# Altium PCB SW.PcbDoc (part 2 of 2)
Units mm, origin at the board's own origin, x right, y up, seen from the top; angles counter-clockwise.
Board outline 130 x 71 mm, 4 copper layers (Top Layer, Mid Layer 1, Mid Layer 2, Bottom Layer), stack 1.57 mm thick; 152 components, 276 nets, 868 pads, 520 vias.
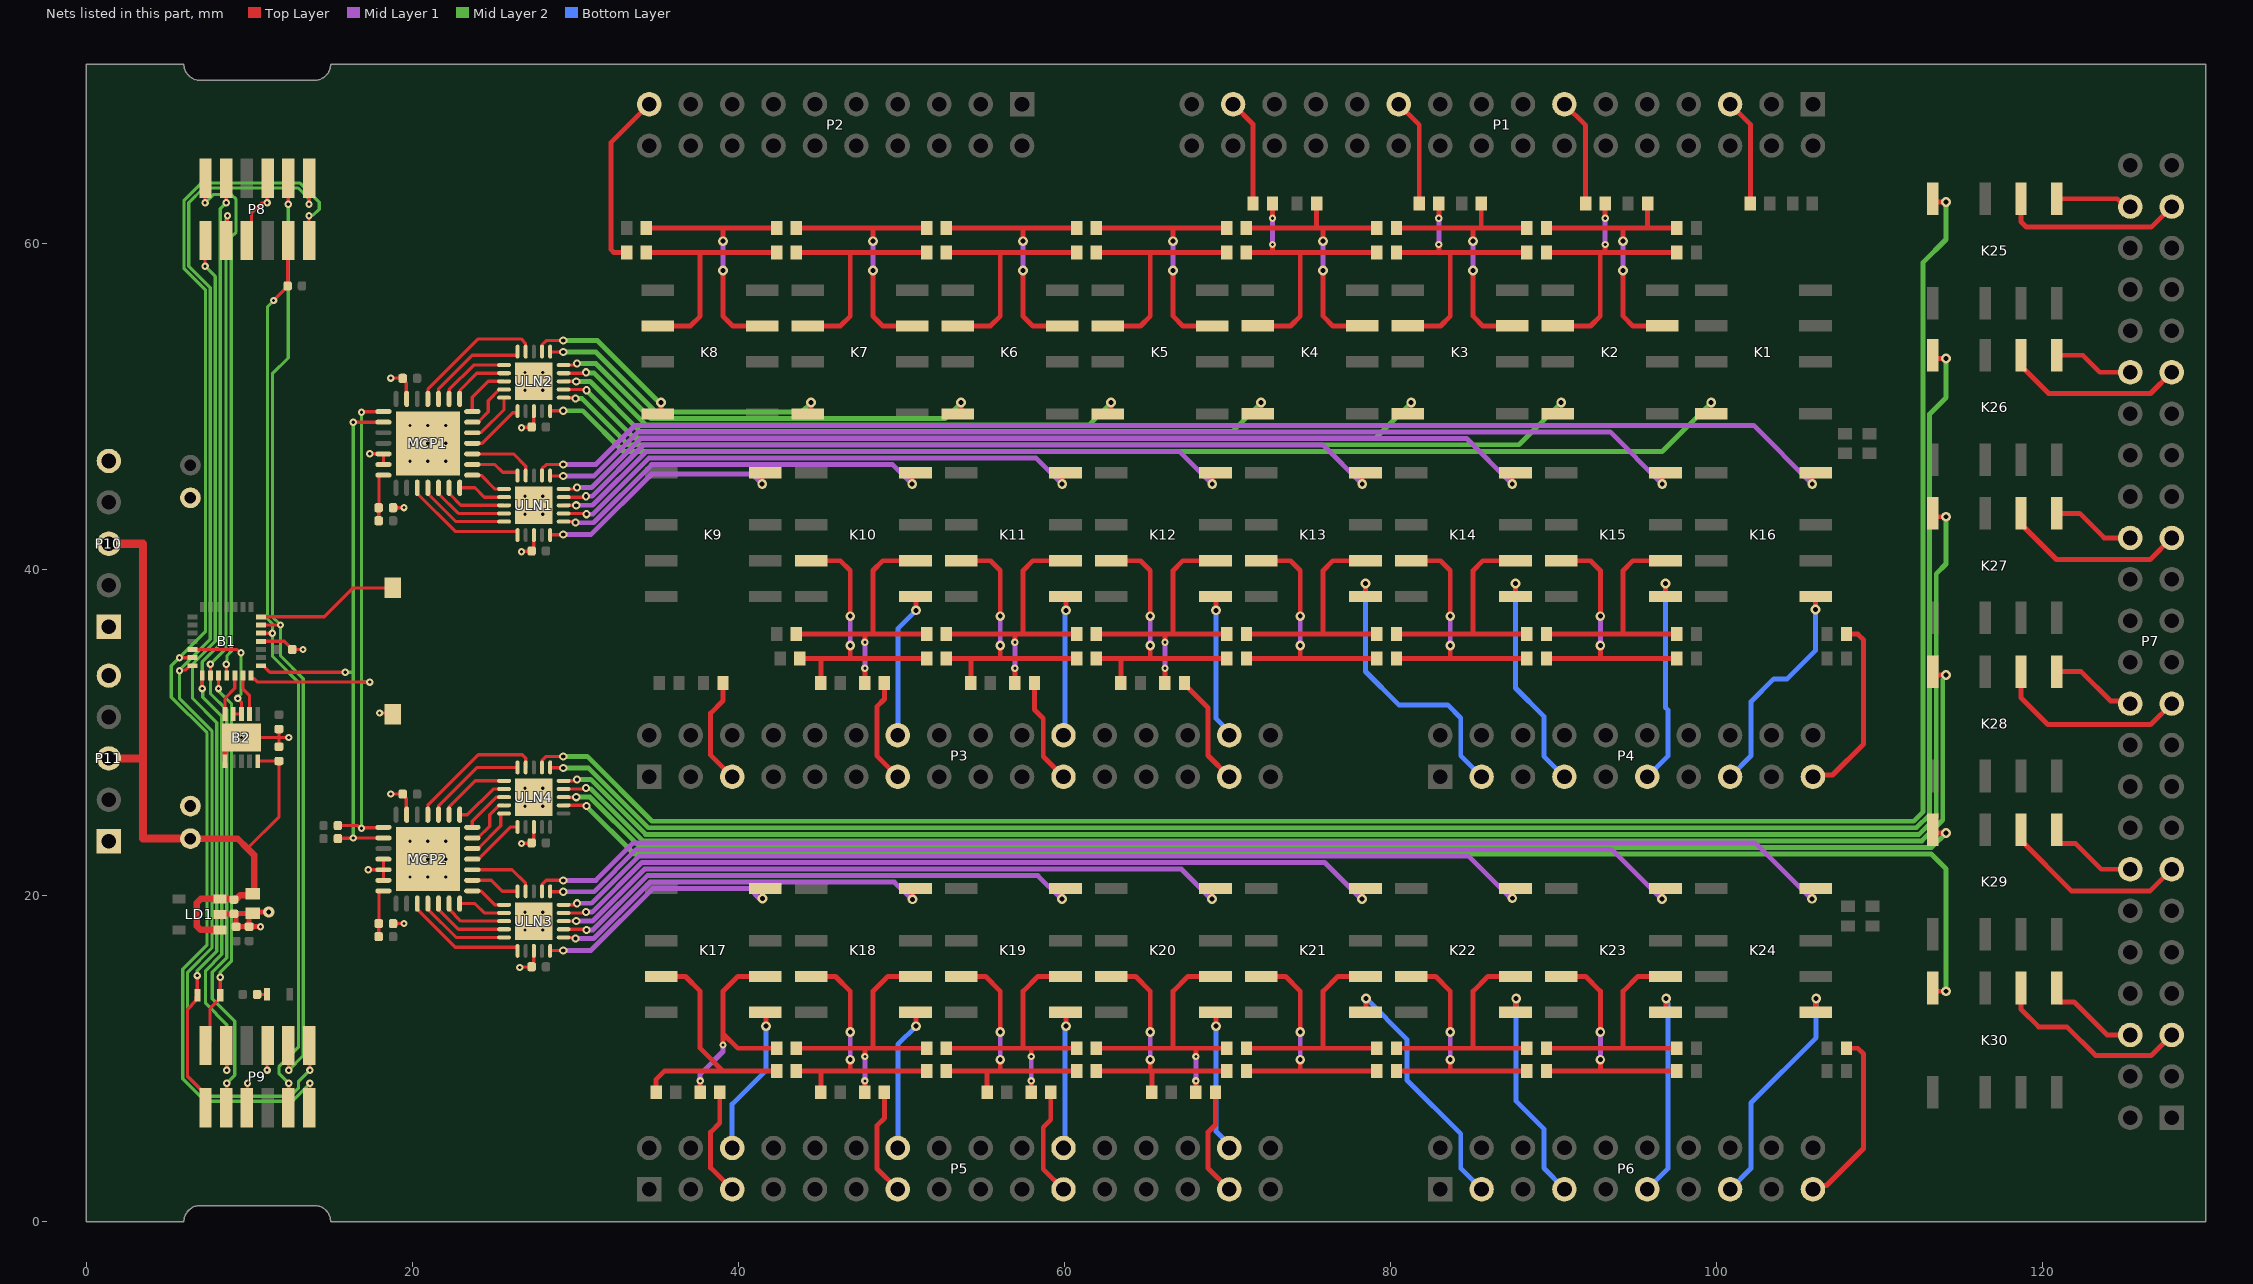
[diagram p4: the nets of this part, all layers, seen from the top]

## Via types
v1: diameter 0.45, hole 0.2, Top Layer to Bottom Layer, 270 vias
v2: diameter 0.6, hole 0.3, Top Layer to Bottom Layer, 180 vias
v3: diameter 0.5, hole 0.2, Top Layer to Bottom Layer, 34 vias
v4: diameter 0.5, hole 0.25, Top Layer to Bottom Layer, 30 vias
v5: diameter 5.5, hole 3, Top Layer to Bottom Layer, 4 vias
v6: diameter 0.7, hole 0.3, Top Layer to Bottom Layer, 2 vias

## Nets (pads, with @x,y where several pads share a name; then routed paths per layer and width w, separated by ;. In a path a pad name is that pad's centre, name@x,y a point inside that pad or via, vN(x,y) a via of type N, cw(c..) or ccw(c..) an arc to the next point about the centre after c; other vN are vias at no path point) (continued)
Bd22: K10.5 P3.14 | length 9
  Top Layer w0.3: K10.5@50.861,38.347 50.9,38.309 v2(50.9,37.5)
  Bottom Layer w0.3: P3.14@49.78,29.84 49.78,36.38 v2(50.9,37.5)
Bd23: K11.5 P3.22 | length 8.6
  Top Layer w0.3: K11.5@60.061,38.347 60.1,38.309 v2(60.1,37.5)
  Bottom Layer w0.3: P3.22@59.94,29.84 60.043,29.943 60.043,37.443 v2(60.1,37.5)
Bd24: K12.5 P3.30 | length 8.9
  Top Layer w0.3: K12.5@69.261,38.347 69.3,38.309 v2(69.3,37.5)
  Bottom Layer w0.3: v2(69.3,37.5) 69.3,30.852 70.1,30.052 P3.30@70.1,29.84
Bd25: K13.5 P4.3 | length 17.3
  Top Layer w0.3: K13.5@78.462,38.347 v2(78.462,39.147)
  Bottom Layer w0.3: v2(78.462,39.147) 78.462,33.747 80.509,31.7 83.5,31.7 84.3,30.9 84.3,28.58 P4.3@85.58,27.3
Bd26: K14.5 P4.7 | length 13.9
  Top Layer w0.3: K14.5@87.662,38.347 v2(87.662,39.147)
  Bottom Layer w0.3: v2(87.662,39.147) 87.662,32.738 89.4,31 89.4,28.56 P4.7@90.66,27.3
Bd27: K15.5 P4.11 | length 13.2
  Top Layer w0.3: K15.5@96.862,38.347 v2(96.862,39.147)
  Bottom Layer w0.3: P4.11@95.74,27.3 97,28.56 97,31.4 96.862,31.538 v2(96.862,39.147)
Bd28: K16.5 P4.15 | length 13.7
  Top Layer w0.3: v2(106.062,37.547) K16.5@106.061,38.347
  Bottom Layer w0.3: P4.15@100.82,27.3 102.1,28.58 102.1,31.9 103.5,33.3 104.314,33.3 106.062,35.047 v2(106.062,37.547)
Bd31: K17.5 P5.6 | length 9.2
  Top Layer w0.3: K17.5@41.661,12.847 41.7,12.809 v2(41.7,12)
  Bottom Layer w0.3: P5.6@39.62,4.529 39.62,7.22 41.7,9.3 v2(41.7,12)
Bd32: K18.5 P5.14 | length 8.8
  Top Layer w0.3: K18.5@50.861,12.848 50.9,12.809 v2(50.9,12)
  Bottom Layer w0.3: P5.14@49.78,4.529 49.78,10.881 v2(50.9,12)
Bd33: K19.5 P5.22 | length 8.4
  Top Layer w0.3: K19.5@60.061,12.848 60.1,12.809 v2(60.1,12)
  Bottom Layer w0.3: P5.22@59.94,4.529 60.042,4.631 60.042,11.943 v2(60.1,12)
Bd34: K20.5 P5.30 | length 8.7
  Top Layer w0.3: K20.5@69.262,12.847 69.3,12.809 v2(69.3,12)
  Bottom Layer w0.3: v2(69.3,12) 69.3,5.541 70.1,4.741 P5.30@70.1,4.529
Bd35: K21.5 P6.3 | length 15.5
  Top Layer w0.3: K21.5@78.461,12.847 78.5,12.886 v2(78.5,13.7)
  Bottom Layer w0.3: v2(78.5,13.7) 81,11.2 81,8.7 84.3,5.4 84.3,3.28 P6.3@85.58,2
Bd36: K22.5 P6.7 | length 13.8
  Top Layer w0.3: K22.5@87.661,12.847 87.7,12.886 v2(87.7,13.7)
  Bottom Layer w0.3: v2(87.7,13.7) 87.7,7.4 89.4,5.7 89.4,3.3 90.66,2.04 P6.7@90.66,2
Bd37: K23.5 P6.11 | length 13.1
  Top Layer w0.3: K23.5@96.861,12.848 96.9,12.886 v2(96.9,13.7)
  Bottom Layer w0.3: P6.11@95.74,2 97,3.26 97,13.388 96.957,13.431 96.957,13.643 v2(96.9,13.7)
Bd38: K24.5 P6.15 | length 14.8
  Top Layer w0.3: K24.5@106.061,12.847 106.1,12.886 v2(106.1,13.7)
  Bottom Layer w0.3: P6.15@100.82,2 102.1,3.28 102.1,7.3 106.1,11.3 v2(106.1,13.7)
Bd41: K30.5 P7.6 | length 6.1
  Top Layer w0.3: K30.5@120.855,14.343 120.855,13.693 121.055,13.493 121.907,13.493 123.94,11.46 P7.6@125.36,11.46
Bd42: K29.5 P7.14 | length 5.9
  Top Layer w0.3: K29.5@120.855,24.043 120.855,23.393 121.055,23.193 122.007,23.193 123.58,21.62 P7.14@125.36,21.62
Bd43: K28.5 P7.22 | length 5.3
  Top Layer w0.3: K28.5@120.855,33.743 122.357,33.743 124.16,31.94 125.2,31.94 P7.22@125.36,31.78
Bd44: K27.5 P7.30 | length 5.1
  Top Layer w0.3: K27.5@120.855,43.443 122.257,43.443 123.76,41.94 P7.30@125.36,41.94
Bd45: K26.5 P7.38 | length 4.9
  Top Layer w0.3: K26.5@120.855,53.143 122.457,53.143 123.5,52.1 P7.38@125.36,52.1
Bd46: K25.5 P7.46 | length 4.7
  Top Layer w0.3: K25.5@120.855,62.743 124.552,62.743 125.035,62.26 P7.46@125.36,62.26
Bs11: P1.5 R2.2 | length 6.6
  Top Layer w0.3: P1.5@100.82,68.54 102.06,67.3 R2.2@102.06,62.44
Bs12: P1.13 R4.2 | length 6.6
  Top Layer w0.3: P1.13@90.66,68.54 91.96,67.24 R4.2@91.96,62.44
Bs13: P1.21 R6.2 | length 6.6
  Top Layer w0.3: P1.21@80.5,68.54 81.76,67.28 R6.2@81.76,62.44
Bs14: P1.29 R8.2 | length 6.6
  Top Layer w0.3: P1.29@70.34,68.54 71.56,67.32 R8.2@71.56,62.44
Bs18: P2.19 R10.2 | length 10.9
  Top Layer w0.3: R10.2@33.16,59.44 32.376,59.44 32.2,59.616 32.2,66.2 P2.19@34.54,68.54
Bs21: P3.5 R28.2 | length 6.6
  Top Layer w0.3: R28.2@39.061,33.044 39.061,31.961 38.3,31.2 38.3,28.62 P3.5@39.62,27.3
Bs22: P3.13 R30.2 | length 6.5
  Top Layer w0.3: R30.2@48.961,33.044 48.961,32.061 48.5,31.6 48.5,28.58 P3.13@49.78,27.3
Bs23: P3.21 R32.2 | length 6.5
  Top Layer w0.3: R32.2@58.161,33.044 58.161,31.404 58.7,30.865 58.7,28.54 P3.21@59.94,27.3
Bs24: P3.29 R34.2 | length 6.9
  Top Layer w0.3: R34.2@67.361,33.044 67.361,32.969 68.8,31.53 68.8,28.6 P3.29@70.1,27.3
Bs28: P4.19 R36.2 | length 11.5
  Top Layer w0.3: P4.19@105.9,27.3 106,27.4 107.1,27.4 109,29.3 109,35.7 108.656,36.044 R36.2@107.961,36.044
Bs31: P5.5 R56.2 | length 6.7
  Top Layer w0.3: R56.2@38.861,7.944 38.861,6.061 38.3,5.5 38.3,3.309 P5.5@39.62,1.989
Bs32: P5.13 R58.2 | length 6.7
  Top Layer w0.3: R58.2@48.961,7.944 48.961,6.361 48.5,5.9 48.5,3.269 P5.13@49.78,1.989
Bs33: P5.21 R60.2 | length 6.7
  Top Layer w0.3: R60.2@59.161,7.944 59.161,6.261 58.7,5.8 58.7,3.229 P5.21@59.94,1.989
Bs34: P5.29 R62.2 | length 6.7
  Top Layer w0.3: R62.2@69.261,7.944 69.261,5.961 68.8,5.5 68.8,3.289 P5.29@70.1,1.989
Bs38: P6.19 R64.2 | length 11.1
  Top Layer w0.3: P6.19@105.9,2 106.13,2.23 106.73,2.23 109,4.5 109,10.3 108.656,10.644 R64.2@107.961,10.644
Bs41: K30.6 P7.5 | length 12.2
  Top Layer w0.3: K30.6@118.658,14.343 118.658,13.042 119.743,11.957 121.477,11.957 123.234,10.2 126.64,10.2 P7.5@127.9,11.46
Bs42: K29.6 P7.13 | length 11.7
  Top Layer w0.3: K29.6@118.658,24.043 118.658,23.393 121.751,20.3 126.58,20.3 P7.13@127.9,21.62
Bs43: K28.6 P7.21 | length 12.1
  Top Layer w0.3: K28.6@118.658,33.743 118.658,32.142 120.3,30.5 126.62,30.5 P7.21@127.9,31.78
Bs44: K27.6 P7.29 | length 11.3
  Top Layer w0.3: K27.6@118.658,43.443 118.658,42.793 120.834,40.616 126.576,40.616 P7.29@127.9,41.94
Bs45: K26.6 P7.37 | length 11.1
  Top Layer w0.3: K26.6@118.658,53.143 118.658,52.493 120.351,50.8 126.6,50.8 P7.37@127.9,52.1
Bs46: K25.6 P7.45 | length 11.3
  Top Layer w0.3: K25.6@118.658,62.743 118.658,61.342 119,61 126.64,61 P7.45@127.9,62.26
BTN: B1.7 X1.2 | length 8.8
  Top Layer w0.2: B1.7@10.725,37.1 14.6,37.1 16.375,38.875 X1.2@18.8,38.875
GND: B1.4 B2.6 B2.11 C1.1 C2.1 C3.2 C4.2 C5.1 C6.1 C7.2 C8.2 C9.2 C10.2 C11.2 C12.2 C13.2 C14.2 C15.2 C16.2 C17.2 LD1.2 MCP1.6 MCP1.12 MCP1.13 MCP1.29 MCP2.6 MCP2.11 MCP2.12 MCP2.13 MCP2.29 P8.5 P8.8 P9.5 P9.8 P10.1 P10.5 P11.1 P11.5 ULN1.8 ULN1.21 ULN2.8 ULN2.21 ULN3.8 ULN3.21 ULN4.8 ULN4.21 X1.1 | length 39.9
  Top Layer w0.2: B2.6@8.525,28.25 B2.6@8.575,28.2 ; v1(9.525,29.7) 9.545,29.68 9.565,29.7 11.845,29.7 ; P9.5@9.865,7 9.9,7.035 v1(9.9,8.505) ; P8.5@9.865,60.19 10.145,60.47 10.145,61.845 10.779,62.479 11.079,62.479 v1(11.1,62.5) 11.1,63.965 P8.8@11.135,64 ; B1.4@10.725,35.6 12.16,35.6 12.64,35.12 C9.2@12.64,35.1 v1(13.3,35.1) ; v1(11.1,9.305) 11.1,10.775 P9.8@11.135,10.81 ; C10.2@11.825,29.14 11.825,29.68 ; C11.2@11.825,30.22 11.825,29.68 ; v1(12.425,29.7) 11.845,29.7 ; v1(17.3,21.6) 17.3,21.592 MCP2.12@18.235,21.592 ; v1(17.4,47.1) 17.404,47.096 18.231,47.096 MCP1.12@18.235,47.092 MCP1.13@18.235,46.442 ; v1(18,31.2) 18.725,31.2 X1.1@18.8,31.125 ; MCP2.13@18.235,20.942 MCP2.12@18.235,21.592 ; MCP2.11@18.235,22.242 MCP2.12@18.235,21.592 ; v1(18.685,26.242) 19.405,26.242 19.405,26.206 19.641,25.97 19.641,24.986 MCP2.6@19.66,24.967 ; v1(18.685,51.742) 19.405,51.742 19.405,51.706 19.641,51.47 19.641,50.486 MCP1.6@19.66,50.467 ; C6.1@18.825,18.292 19.5,18.292 v1(19.5,18.3) ; C2.1@18.825,43.792 19.5,43.792 v1(19.5,43.8) ; v1(26.6,15.6) 26.621,15.621 27.299,15.621 C8.2@27.32,15.642 27.451,15.773 27.451,16.608 ULN3.8@27.46,16.617 ; v1(26.7,23.2) 26.721,23.221 27.299,23.221 C7.2@27.32,23.242 27.451,23.373 27.451,24.208 ULN4.8@27.46,24.217 ; v1(26.7,41.1) 26.721,41.121 27.299,41.121 C4.2@27.32,41.142 27.451,41.273 27.451,42.108 ULN1.8@27.46,42.117 ; v1(26.7,48.7) 26.721,48.721 27.299,48.721 C3.2@27.32,48.742 27.451,48.873 27.451,49.708 ULN2.8@27.46,49.717 ; 11.825,29.68 11.845,29.7
  Top Layer w0.3: LD1.2@8.175,18.825 8.235,18.885 C12.2@9.065,18.885 C12.2@9.1,18.92 ; B2.6@8.525,28.25 8.525,29 9.225,29.7 v1(9.525,29.7) ; v1(10.7,18.1) C14.2@10,18.1 ; v6(11.2,19) C13.2@10.3,19 ; C12.2@9.1,18.92 9.2,18.82 C15.2@9.2,18.1 C14.2@10,18.1 ; C12.2@9.1,18.92 C13.2@10.13,18.92 ; C14.2@10,18.1 10,18.79 C13.2@10.13,18.92 ; C13.2@10.13,18.92 10.21,19 C13.2@10.3,19 ; C13.2@10.13,18.92 C13.2@10.22,18.92 C13.2@10.3,19
  other v3: 26.91,17.892 28.01,17.892 26.91,18.992 28.01,18.992 19.86,21.142 20.96,21.142 22.06,21.142 19.86,22.242 20.96,22.242 22.06,22.242 19.86,23.342 20.96,23.342 22.06,23.342 26.91,25.492 28.01,25.492 26.91,26.592 28.01,26.592 26.91,43.392 28.01,43.392 26.91,44.492 28.01,44.492 19.86,46.642 20.96,46.642 22.06,46.642 19.86,47.742 20.96,47.742 22.06,47.742 19.86,48.842 20.96,48.842 22.06,48.842 26.91,50.992 28.01,50.992 26.91,52.092 28.01,52.092
INT: B1.6 P8.10 P9.10 | length 59
  Top Layer w0.2: B1.6@10.725,36.6 v1(11.925,36.6) ; v1(12.4,62.4) 12.4,63.995 P8.10@12.405,64 ; P9.10@12.405,10.81 12.425,10.79 v1(12.425,9.3)
  Mid Layer 2 w0.2: v1(12.4,62.4) 12.4,52.975 11.427,52.002 11.427,37.098 v1(11.925,36.6) 11.925,34.7 13.325,33.3 13.325,10.2 v1(12.425,9.3)
MISO: J1.1 P8.1 P9.1 | length 55.9
  Top Layer w0.2: v1(6.825,15.1) J1.1@6.825,13.9 6.734,13.81 6.734,13.556 6.225,13.046 6.225,8.92 7.325,7.82 P9.1@7.325,7 ; v1(7.3,58.6) 7.3,60.165 P8.1@7.325,60.19 P8.1@7.3,60.215
  Mid Layer 2 w0.2: v1(6.825,15.1) 6.825,15.4 8.02,16.595 8.02,30.605 6.525,32.1 6.525,34.2 7.92,35.595 7.92,57.98 v1(7.3,58.6)
MISO_MCU: B1.24 J1.2 P9.2 | length 23.7
  Top Layer w0.2: P9.2@7.325,10.81 7.605,11.09 7.605,13.093 8.222,13.71 J1.2@8.222,13.9 8.223,13.902 v1(8.225,15) v1(8.225,15) ; v1(8.125,32.7) B1.24@8.125,33.5
  Mid Layer 2 w0.2: v1(8.125,32.7) 8.173,32.652 8.173,32.51 8.925,31.758 8.925,16 8.225,15.3 v1(8.225,15)
MOSI_MCU: B1.25 P8.2 | length 33.2
  Top Layer w0.2: v1(7.3,62.5) 7.3,63.975 P8.2@7.325,64 ; v1(8.6,34.2) 8.612,34.188 8.612,33.513 B1.25@8.625,33.5
  Mid Layer 2 w0.2: v1(7.3,62.5) 7.8,63 8.9,63 9.2,62.7 9.2,60.7 8.9,60.4 8.9,34.984 8.641,34.725 8.641,34.241 v1(8.6,34.2)
NetC2_2: C2.2 MCP1.14 R44.2 | length 3.1
  Top Layer w0.2: R44.2@17.945,42.992 C2.2@17.945,43.792 17.965,43.812 17.965,45.746 18.012,45.792 MCP1.14@18.235,45.792
NetC6_2: C6.2 MCP2.14 R54.2 | length 3.1
  Top Layer w0.2: R54.2@17.945,17.492 C6.2@17.945,18.292 17.965,18.312 17.965,20.246 18.012,20.292 MCP2.14@18.235,20.292
NetJ2_2: J2.2 R81.1 | length 0.6
  Top Layer w0.2: R81.1@10.484,13.946 11.082,13.946 J2.2@11.09,13.954
NetK2_3: K2.3 R3.1 R11.2 R12.1 | length 17.6
  Top Layer w0.3: R12.1@89.56,60.94 94.16,60.94 ; v2(94.26,58.34) 94.26,55.54 94.86,54.94 K2.3@96.66,54.94 ; v2(94.26,60.14) 94.26,60.84 94.16,60.94 ; R3.1@95.76,62.44 95.76,60.997 95.796,60.961 ; R11.2@97.56,60.94 94.16,60.94
  Mid Layer 1 w0.3: v2(94.26,58.34) v2(94.26,60.14)
NetK2_6: K2.6 R4.1 R18.2 R19.1 | length 17.5
  Top Layer w0.3: R19.1@89.56,59.44 92.86,59.44 ; K2.6@90.46,54.94 92.26,54.94 92.86,55.54 92.86,59.44 ; 93.16,59.44 v1(93.16,59.94) ; v1(93.16,61.54) R4.1@93.16,62.44 ; R18.2@97.56,59.44 92.86,59.44
  Mid Layer 1 w0.3: v1(93.16,59.94) v1(93.16,61.54)
NetK3_3: K3.3 R5.1 R12.2 R13.1 | length 17.6
  Top Layer w0.3: R13.1@80.36,60.94 84.96,60.94 ; v2(85.06,58.34) 85.06,55.54 85.66,54.94 K3.3@87.46,54.94 ; v2(85.06,60.14) 85.06,60.84 84.96,60.94 ; R5.1@85.56,62.44 85.56,60.94 ; R12.2@88.36,60.94 85.56,60.94 ; 84.96,60.94 85.56,60.94
  Mid Layer 1 w0.3: v2(85.06,58.34) v2(85.06,60.14)
NetK3_6: K3.6 R6.1 R19.2 R20.1 | length 17.5
  Top Layer w0.3: R20.1@80.36,59.44 82.96,59.44 ; K3.6@81.26,54.94 83.06,54.94 83.66,55.54 83.66,59.44 ; v1(82.96,59.94) 82.96,59.44 ; v1(82.96,61.54) R6.1@82.96,62.44 ; R19.2@88.36,59.44 83.66,59.44 ; 82.96,59.44 83.66,59.44
  Mid Layer 1 w0.3: v1(82.96,59.94) v1(82.96,61.54)
NetK4_3: K4.3 R7.1 R13.2 R14.1 | length 17.6
  Top Layer w0.3: R14.1@71.16,60.94 75.46,60.94 ; R7.1@75.46,62.44 75.46,60.94 ; v2(75.86,58.34) 75.86,55.54 76.46,54.94 K4.3@78.26,54.94 ; v2(75.86,60.14) 75.86,60.84 75.76,60.94 ; R13.2@79.16,60.94 75.76,60.94 ; 75.46,60.94 75.76,60.94
  Mid Layer 1 w0.3: v2(75.86,58.34) v2(75.86,60.14)
NetK4_6: K4.6 R8.1 R20.2 R21.1 | length 17.5
  Top Layer w0.3: R21.1@71.16,59.44 74.46,59.44 ; K4.6@72.06,54.94 73.86,54.94 74.46,55.54 74.46,59.44 ; 72.76,59.44 v1(72.76,59.94) ; v1(72.76,61.54) R8.1@72.76,62.44 ; R20.2@79.16,59.44 74.46,59.44
  Mid Layer 1 w0.3: v1(72.76,59.94) v1(72.76,61.54)
NetK5_3: K5.3 R14.2 R15.1 | length 16.1
  Top Layer w0.3: R15.1@61.96,60.94 66.56,60.94 ; v2(66.66,58.34) 66.66,55.54 67.26,54.94 K5.3@69.06,54.94 ; v2(66.66,60.14) 66.66,60.84 66.56,60.94 ; R14.2@69.96,60.94 66.56,60.94
  Mid Layer 1 w0.3: v2(66.66,58.34) v2(66.66,60.14)
NetK5_6: K5.6 R21.2 R22.1 | length 14.5
  Top Layer w0.3: R22.1@61.96,59.44 65.26,59.44 ; K5.6@62.86,54.94 64.66,54.94 65.26,55.54 65.26,59.44 ; R21.2@69.96,59.44 65.26,59.44
NetK6_3: K6.3 R15.2 R16.1 | length 16.1
  Top Layer w0.3: R16.1@52.76,60.94 57.36,60.94 ; v2(57.46,58.34) 57.46,55.54 58.06,54.94 K6.3@59.86,54.94 ; v2(57.46,60.14) 57.46,60.84 57.36,60.94 ; R15.2@60.76,60.94 57.36,60.94
  Mid Layer 1 w0.3: v2(57.46,58.34) v2(57.46,60.14)
NetK6_6: K6.6 R22.2 R23.1 | length 14.5
  Top Layer w0.3: R23.1@52.76,59.44 56.06,59.44 ; K6.6@53.66,54.94 55.46,54.94 56.06,55.54 56.06,59.44 ; R22.2@60.76,59.44 56.06,59.44
NetK7_3: K7.3 R16.2 R17.1 | length 16.1
  Top Layer w0.3: R17.1@43.56,60.94 48.16,60.94 ; v2(48.26,58.34) 48.26,55.54 48.86,54.94 K7.3@50.66,54.94 ; v2(48.26,60.14) 48.26,60.84 48.16,60.94 ; R16.2@51.56,60.94 48.16,60.94
  Mid Layer 1 w0.3: v2(48.26,58.34) v2(48.26,60.14)
NetK7_6: K7.6 R23.2 R24.1 | length 14.5
  Top Layer w0.3: R24.1@43.56,59.44 46.86,59.44 ; K7.6@44.46,54.94 46.26,54.94 46.86,55.54 46.86,59.44 ; R23.2@51.56,59.44 46.86,59.44
NetK8_3: K8.3 R9.1 R17.2 | length 16.1
  Top Layer w0.3: R9.1@34.36,60.94 38.96,60.94 ; v2(39.06,58.34) 39.06,55.54 39.66,54.94 K8.3@41.46,54.94 ; v2(39.06,60.14) 39.06,60.84 38.96,60.94 ; R17.2@42.36,60.94 38.96,60.94
  Mid Layer 1 w0.3: v2(39.06,58.34) v2(39.06,60.14)
NetK8_6: K8.6 R10.1 R24.2 | length 14.5
  Top Layer w0.3: R10.1@34.36,59.44 37.66,59.44 ; K8.6@35.26,54.94 37.06,54.94 37.66,55.54 37.66,59.44 ; R24.2@42.36,59.44 37.66,59.44
NetK10_3: K10.3 R29.1 R37.2 R38.1 | length 35.2
  Top Layer w0.3: 45.061,34.544 R29.1@45.061,33.044 45.061,34.544 ; 45.061,34.544 43.561,34.544 45.061,34.544 ; 45.061,34.544 46.961,34.544 ; 45.061,34.544 46.961,34.544 ; 46.261,40.544 46.861,39.944 ; 46.261,40.544 K10.3@44.461,40.544 46.261,40.544 ; 46.261,40.544 46.861,39.944 ; 46.861,34.644 46.961,34.544 ; 46.861,34.644 v2(46.861,35.344) 46.861,34.644 ; 46.861,34.644 46.961,34.544 ; 46.861,39.944 v2(46.861,37.144) 46.861,39.944 ; 46.961,34.544 R38.1@51.561,34.544 46.961,34.544
  Mid Layer 1 w0.3: v2(46.861,35.344) v2(46.861,37.144) v2(46.861,35.344)
  other v2: 46.861,35.344 46.861,37.144
NetK10_6: K10.6 R30.1 R45.2 R46.1 | length 35.1
  Top Layer w0.3: 48.261,36.044 R46.1@51.561,36.044 48.261,36.044 ; 48.261,36.044 R45.2@43.561,36.044 48.261,36.044 ; 48.261,36.044 48.261,39.944 ; 48.261,36.044 48.261,39.944 ; 48.261,39.944 48.861,40.544 ; 48.261,39.944 48.861,40.544 ; 48.861,40.544 50.661,40.544 48.861,40.544 ; R30.1@47.761,33.044 v1(47.761,33.944) R30.1@47.761,33.044 ; v1(47.761,35.544) 47.761,36.044 v1(47.761,35.544)
  Mid Layer 1 w0.3: v1(47.761,33.944) v1(47.761,35.544) v1(47.761,33.944)
  other v1: 47.761,33.944 47.761,35.544
NetK11_3: K11.3 R31.1 R38.2 R39.1 | length 17.6
  Top Layer w0.3: R38.2@52.761,34.544 54.261,34.544 ; K11.3@53.661,40.544 55.461,40.544 56.061,39.944 v2(56.061,37.144) ; R31.1@54.261,33.044 54.261,34.544 ; v2(56.061,35.344) 56.061,34.644 56.161,34.544 ; R39.1@60.761,34.544 56.161,34.544 ; 54.261,34.544 56.161,34.544
  Mid Layer 1 w0.3: v2(56.061,35.344) v2(56.061,37.144)
NetK11_6: K11.6 R32.1 R46.2 R47.1 | length 17.5
  Top Layer w0.3: R46.2@52.761,36.044 57.461,36.044 ; R32.1@56.961,33.044 v1(56.961,33.944) ; v1(56.961,35.544) 56.961,36.044 ; K11.6@59.861,40.544 58.061,40.544 57.461,39.944 57.461,36.044 ; R47.1@60.761,36.044 57.461,36.044
  Mid Layer 1 w0.3: v1(56.961,33.944) v1(56.961,35.544)
NetK12_3: K12.3 R33.1 R39.2 R40.1 | length 17.6
  Top Layer w0.3: R39.2@61.961,34.544 63.461,34.544 ; K12.3@62.861,40.544 64.661,40.544 65.261,39.944 v2(65.261,37.144) ; R33.1@63.461,33.044 63.461,34.544 ; v2(65.261,35.344) 65.261,34.644 65.361,34.544 ; R40.1@69.961,34.544 65.361,34.544 ; 63.461,34.544 65.361,34.544
  Mid Layer 1 w0.3: v2(65.261,35.344) v2(65.261,37.144)
NetK12_6: K12.6 R34.1 R47.2 R48.1 | length 17.5
  Top Layer w0.3: R47.2@61.961,36.044 66.661,36.044 ; R34.1@66.161,33.044 v1(66.161,33.944) ; v1(66.161,35.544) 66.161,36.044 ; K12.6@69.061,40.544 67.261,40.544 66.661,39.944 66.661,36.044 ; R48.1@69.961,36.044 66.661,36.044
  Mid Layer 1 w0.3: v1(66.161,33.944) v1(66.161,35.544)
NetK13_3: K13.3 R40.2 R41.1 | length 16.1
  Top Layer w0.3: R40.2@71.161,34.544 72.661,34.544 74.561,34.544 ; K13.3@72.061,40.544 73.861,40.544 74.461,39.944 v2(74.461,37.144) ; v2(74.461,35.344) 74.461,34.644 74.561,34.544 ; R41.1@79.161,34.544 74.561,34.544
  Mid Layer 1 w0.3: v2(74.461,35.344) v2(74.461,37.144)
NetK13_6: K13.6 R48.2 R49.1 | length 14.5
  Top Layer w0.3: R48.2@71.161,36.044 75.861,36.044 ; K13.6@78.261,40.544 76.461,40.544 75.861,39.944 75.861,36.044 ; R49.1@79.161,36.044 75.861,36.044
NetK14_3: K14.3 R41.2 R42.1 | length 16.1
  Top Layer w0.3: R41.2@80.361,34.544 81.861,34.544 83.761,34.544 ; K14.3@81.261,40.544 83.061,40.544 83.661,39.944 v2(83.661,37.144) ; v2(83.661,35.344) 83.661,34.644 83.761,34.544 ; R42.1@88.361,34.544 83.761,34.544
  Mid Layer 1 w0.3: v2(83.661,35.344) v2(83.661,37.144)
NetK14_6: K14.6 R49.2 R50.1 | length 14.5
  Top Layer w0.3: R49.2@80.361,36.044 85.061,36.044 ; K14.6@87.461,40.544 85.661,40.544 85.061,39.944 85.061,36.044 ; R50.1@88.361,36.044 85.061,36.044
NetK15_3: K15.3 R42.2 R43.1 | length 16.1
  Top Layer w0.3: R42.2@89.561,34.544 91.061,34.544 92.961,34.544 ; K15.3@90.461,40.544 92.261,40.544 92.861,39.944 v2(92.861,37.144) ; v2(92.861,35.344) 92.861,34.644 92.961,34.544 ; R43.1@97.561,34.544 92.961,34.544
  Mid Layer 1 w0.3: v2(92.861,35.344) v2(92.861,37.144)
NetK15_6: K15.6 R50.2 R51.1 | length 14.5
  Top Layer w0.3: R50.2@89.561,36.044 94.261,36.044 ; K15.6@96.661,40.544 94.861,40.544 94.261,39.944 94.261,36.044 ; R51.1@97.561,36.044 94.261,36.044
NetK17_3: K17.3 R55.1 R65.1 | length 16.7
  Top Layer w0.3: R55.1@34.961,7.944 34.961,8.744 35.461,9.244 39.061,9.244 ; K17.3@35.261,15.044 36.761,15.044 37.661,14.144 37.661,10.644 39.061,9.244 ; R65.1@42.361,9.244 39.061,9.244
NetK17_6: K17.6 R56.1 R72.1 | length 13.2
  Top Layer w0.3: R56.1@37.661,7.944 v1(37.661,8.644) ; v1(39.061,10.844) 39.061,11.544 ; K17.6@41.461,15.044 39.961,15.044 39.061,14.144 39.061,11.544 ; R72.1@42.361,10.644 39.961,10.644 39.061,11.544
  Mid Layer 1 w0.3: v1(37.661,8.644) 37.661,9.044 39.061,10.444 v1(39.061,10.844)
NetK18_3: K18.3 R57.1 R65.2 R66.1 | length 17
  Top Layer w0.3: R65.2@43.561,9.244 45.061,9.244 ; K18.3@44.46,15.045 45.961,15.044 46.861,14.144 v2(46.861,11.644) ; R57.1@45.061,7.944 45.061,9.244 ; v2(46.861,9.944) 46.861,9.244 ; R66.1@51.561,9.244 46.861,9.244 ; 45.061,9.244 46.861,9.244
  Mid Layer 1 w0.3: v2(46.861,9.944) v2(46.861,11.644)
NetK18_6: K18.6 R58.1 R72.2 R73.1 | length 17
  Top Layer w0.3: R72.2@43.561,10.644 47.761,10.644 ; R58.1@47.761,7.944 v1(47.761,8.644) ; v1(47.761,10.144) 47.761,10.644 ; K18.6@50.661,15.044 49.161,15.044 48.261,14.144 48.261,10.644 ; R73.1@51.561,10.644 48.261,10.644 ; 47.761,10.644 48.261,10.644
  Mid Layer 1 w0.3: v1(47.761,8.644) v1(47.761,10.144)
NetK19_3: K19.3 R59.1 R66.2 R67.1 | length 17
  Top Layer w0.3: R66.2@52.761,9.244 55.261,9.244 ; K19.3@53.66,15.045 55.161,15.044 56.061,14.144 v2(56.061,11.644) ; R59.1@55.261,7.944 55.261,9.244 ; v2(56.061,9.944) 56.061,9.244 ; R67.1@60.761,9.244 56.061,9.244 ; 55.261,9.244 56.061,9.244
  Mid Layer 1 w0.3: v2(56.061,9.944) v2(56.061,11.644)
NetK19_6: K19.6 R60.1 R73.2 R74.1 | length 17
  Top Layer w0.3: R73.2@52.761,10.644 57.461,10.644 ; R60.1@57.961,7.944 v1(57.961,8.644) ; v1(57.961,10.144) 57.961,10.644 ; K19.6@59.861,15.044 58.361,15.044 57.461,14.144 57.461,10.644 ; R74.1@60.761,10.644 57.961,10.644 ; 57.461,10.644 57.961,10.644
  Mid Layer 1 w0.3: v1(57.961,8.644) v1(57.961,10.144)
NetK20_3: K20.3 R61.1 R67.2 R68.1 | length 17
  Top Layer w0.3: R67.2@61.961,9.244 65.261,9.244 ; K20.3@62.861,15.044 64.361,15.044 65.261,14.144 v2(65.261,11.644) ; v2(65.261,9.944) 65.261,9.244 ; R61.1@65.361,7.944 65.361,9.144 65.261,9.244 ; R68.1@69.961,9.244 65.261,9.244
  Mid Layer 1 w0.3: v2(65.261,9.944) v2(65.261,11.644)
NetK20_6: K20.6 R62.1 R74.2 R75.1 | length 17
  Top Layer w0.3: R74.2@61.961,10.644 66.661,10.644 ; R62.1@68.061,7.944 v1(68.061,8.644) ; v1(68.061,10.144) 68.061,10.644 ; K20.6@69.061,15.044 67.561,15.044 66.661,14.144 66.661,10.644 ; R75.1@69.961,10.644 68.061,10.644 ; 66.661,10.644 68.061,10.644
  Mid Layer 1 w0.3: v1(68.061,8.644) v1(68.061,10.144)
NetK21_3: K21.3 R68.2 R69.1 | length 15.7
  Top Layer w0.3: R68.2@71.161,9.244 73.661,9.244 74.461,9.244 ; K21.3@72.061,15.044 73.561,15.044 74.461,14.144 v2(74.461,11.644) ; v2(74.461,9.944) 74.461,9.244 ; R69.1@79.161,9.244 74.461,9.244
  Mid Layer 1 w0.3: v2(74.461,9.944) v2(74.461,11.644)
NetK21_6: K21.6 R75.2 R76.1 | length 14.3
  Top Layer w0.3: R75.2@71.161,10.644 75.861,10.644 ; K21.6@78.261,15.044 76.761,15.044 75.861,14.144 75.861,10.644 ; R76.1@79.161,10.644 76.361,10.644 75.861,10.644
NetK22_3: K22.3 R69.2 R70.1 | length 15.7
  Top Layer w0.3: R69.2@80.361,9.244 82.861,9.244 83.661,9.244 ; K22.3@81.261,15.044 82.761,15.044 83.661,14.144 v2(83.661,11.644) ; v2(83.661,9.944) 83.661,9.244 ; R70.1@88.361,9.244 83.661,9.244
  Mid Layer 1 w0.3: v2(83.661,9.944) v2(83.661,11.644)
NetK22_6: K22.6 R76.2 R77.1 | length 14.3
  Top Layer w0.3: R76.2@80.361,10.644 85.061,10.644 ; K22.6@87.461,15.044 85.961,15.044 85.061,14.144 85.061,10.644 ; R77.1@88.361,10.644 85.561,10.644 85.061,10.644
NetK23_3: K23.3 R70.2 R71.1 | length 15.7
  Top Layer w0.3: R70.2@89.561,9.244 92.061,9.244 92.861,9.244 ; K23.3@90.461,15.044 91.961,15.044 92.861,14.144 v2(92.861,11.644) ; v2(92.861,9.944) 92.861,9.244 ; R71.1@97.561,9.244 92.861,9.244
  Mid Layer 1 w0.3: v2(92.861,9.944) v2(92.861,11.644)
NetK23_6: K23.6 R77.2 R78.1 | length 14.3
  Top Layer w0.3: R77.2@89.561,10.644 94.261,10.644 ; K23.6@96.661,15.044 95.161,15.044 94.261,14.144 94.261,10.644 ; R78.1@97.561,10.644 94.761,10.644 94.261,10.644
NetMCP1_1: MCP1.1 ULN2.2 | length 3.7
  Top Layer w0.2: MCP1.1@22.91,50.467 22.929,50.486 22.929,51.011 23.96,52.042 ULN2.2@25.635,52.042
NetMCP1_2: MCP1.2 ULN2.1 | length 4.6
  Top Layer w0.2: MCP1.2@22.26,50.467 22.266,50.473 22.266,51.048 23.76,52.542 ULN2.1@25.635,52.542
NetMCP1_3: MCP1.3 ULN2.20 | length 6.5
  Top Layer w0.2: MCP1.3@21.61,50.467 21.61,51.068 23.685,53.142 26.437,53.142 26.46,53.165 ULN2.20@26.46,53.367
NetMCP1_4: MCP1.4 ULN2.19 | length 8.5
  Top Layer w0.2: MCP1.4@20.96,50.467 20.966,50.473 20.966,51.048 24.06,54.142 26.675,54.142 26.955,53.862 26.955,53.373 ULN2.19@26.96,53.367
NetMCP1_17: MCP1.17 ULN1.6 | length 7.7
  Top Layer w0.2: MCP1.17@20.31,45.017 20.31,44.667 22.635,42.342 26.437,42.342 26.46,42.319 ULN1.6@26.46,42.117
NetMCP1_18: MCP1.18 ULN1.5 | length 5.7
  Top Layer w0.2: MCP1.18@20.96,45.017 20.96,44.667 22.685,42.942 ULN1.5@25.635,42.942
NetMCP1_19: MCP1.19 ULN1.4 | length 4.9
  Top Layer w0.2: MCP1.19@21.61,45.017 21.61,44.667 22.835,43.442 ULN1.4@25.635,43.442
NetMCP1_20: MCP1.20 ULN1.3 | length 4
  Top Layer w0.2: MCP1.20@22.26,45.017 22.26,44.667 22.985,43.942 ULN1.3@25.635,43.942
NetMCP1_21: MCP1.21 ULN1.2 | length 3
  Top Layer w0.2: MCP1.21@22.91,45.017 23.852,45.017 24.427,44.442 ULN1.2@25.635,44.442
NetMCP1_22: MCP1.22 ULN1.1 | length 2.3
  Top Layer w0.2: MCP1.22@23.685,45.792 23.704,45.773 24.229,45.773 25.06,44.942 ULN1.1@25.635,44.942
NetMCP1_23: MCP1.23 ULN1.20 | length 3.2
  Top Layer w0.2: MCP1.23@23.685,46.442 25.077,46.442 25.552,45.967 26.437,45.967 26.46,45.944 ULN1.20@26.46,45.767
NetMCP1_24: MCP1.24 ULN1.19 | length 4.2
  Top Layer w0.2: MCP1.24@23.685,47.092 26.21,47.092 26.96,46.342 ULN1.19@26.96,45.767
NetMCP1_25: MCP1.25 ULN2.6 | length 3.6
  Top Layer w0.2: MCP1.25@23.685,47.742 24.282,47.742 26.153,49.613 26.437,49.613 26.46,49.636 ULN2.6@26.46,49.717
NetMCP1_26: MCP1.26 ULN2.5 | length 3.3
  Top Layer w0.2: MCP1.26@23.685,48.392 23.704,48.411 24.229,48.411 25.635,49.817 ULN2.5@25.635,50.542
NetMCP1_27: MCP1.27 ULN2.4 | length 3.2
  Top Layer w0.2: MCP1.27@23.685,49.042 24.035,49.042 24.66,49.667 24.66,50.367 25.335,51.042 ULN2.4@25.635,51.042
NetMCP1_28: MCP1.28 ULN2.3 | length 3.2
  Top Layer w0.2: MCP1.28@23.685,49.692 23.685,50.567 24.66,51.542 ULN2.3@25.635,51.542
NetMCP2_1: MCP2.1 ULN4.2 | length 3.4
  Top Layer w0.2: MCP2.1@22.91,24.967 23.385,24.967 24.96,26.542 ULN4.2@25.635,26.542
NetMCP2_2: MCP2.2 ULN4.1 | length 4.5
  Top Layer w0.2: MCP2.2@22.26,24.967 22.279,24.986 22.279,25.461 23.86,27.042 ULN4.1@25.635,27.042
NetMCP2_3: MCP2.3 ULN4.20 | length 6.4
  Top Layer w0.2: MCP2.3@21.61,24.967 21.629,24.986 21.629,25.511 23.985,27.867 ULN4.20@26.46,27.867
NetMCP2_4: MCP2.4 ULN4.19 | length 8.5
  Top Layer w0.2: MCP2.4@20.96,24.967 20.966,24.973 20.966,25.548 24.06,28.642 26.76,28.642 26.96,28.442 ULN4.19@26.96,27.867
NetMCP2_17: MCP2.17 ULN3.6 | length 7.7
  Top Layer w0.2: MCP2.17@20.31,19.517 20.31,19.167 22.635,16.842 26.437,16.842 26.46,16.819 ULN3.6@26.46,16.617
NetMCP2_18: MCP2.18 ULN3.5 | length 5.7
  Top Layer w0.2: MCP2.18@20.96,19.517 20.96,19.167 22.685,17.442 ULN3.5@25.635,17.442
NetMCP2_19: MCP2.19 ULN3.4 | length 4.9
  Top Layer w0.2: MCP2.19@21.61,19.517 21.61,19.167 22.835,17.942 ULN3.4@25.635,17.942
NetMCP2_20: MCP2.20 ULN3.3 | length 4
  Top Layer w0.2: MCP2.20@22.26,19.517 22.26,19.167 22.985,18.442 ULN3.3@25.635,18.442
NetMCP2_21: MCP2.21 ULN3.2 | length 3
  Top Layer w0.2: MCP2.21@22.91,19.517 23.852,19.517 24.427,18.942 ULN3.2@25.635,18.942
NetMCP2_22: MCP2.22 ULN3.1 | length 2.3
  Top Layer w0.2: MCP2.22@23.685,20.292 23.704,20.273 24.229,20.273 25.06,19.442 ULN3.1@25.635,19.442
NetMCP2_23: MCP2.23 ULN3.20 | length 3.1
  Top Layer w0.2: MCP2.23@23.685,20.942 24.86,20.942 25.535,20.267 ULN3.20@26.46,20.267
NetMCP2_24: MCP2.24 ULN3.19 | length 4.1
  Top Layer w0.2: MCP2.24@23.685,21.592 26.12,21.592 26.952,20.76 26.952,20.275 ULN3.19@26.96,20.267
NetMCP2_25: MCP2.25 ULN4.6 | length 3.6
  Top Layer w0.2: MCP2.25@23.685,22.242 24.06,22.242 26.035,24.217 ULN4.6@26.46,24.217
NetMCP2_26: MCP2.26 ULN4.5 | length 3.3
  Top Layer w0.2: MCP2.26@23.685,22.892 24.035,22.892 25.435,24.292 25.435,25.019 25.458,25.042 ULN4.5@25.635,25.042
NetMCP2_27: MCP2.27 ULN4.4 | length 3.2
  Top Layer w0.2: MCP2.27@23.685,23.542 24.035,23.542 24.76,24.267 24.76,24.967 25.335,25.542 ULN4.4@25.635,25.542
NetMCP2_28: MCP2.28 ULN4.3 | length 2.9
  Top Layer w0.2: MCP2.28@23.685,24.192 23.685,24.567 25.151,26.033 25.626,26.033 ULN4.3@25.635,26.042
R11: K1.8 ULN2.10 | length 74.2
  Top Layer w0.2: ULN2.10@28.46,49.717 28.46,49.719 28.483,49.742 v4(29.26,49.742)
  Top Layer w0.3: K1.8@99.66,49.542 v2(99.66,50.242)
  Mid Layer 2 w0.3: v4(29.26,49.742) 30.46,49.742 32.96,47.242 96.66,47.242 v2(99.66,50.242)
R12: K2.8 ULN2.11 | length 64.1
  Top Layer w0.2: ULN2.11@29.285,50.542 29.963,50.542 v4(30.024,50.481)
  Top Layer w0.3: K2.8@90.46,49.542 v2(90.46,50.242)
  Mid Layer 2 w0.3: v4(30.024,50.481) 30.421,50.481 33.245,47.657 87.875,47.657 v2(90.46,50.242)
R13: K3.8 ULN2.12 | length 54.8
  Top Layer w0.2: ULN2.12@29.285,51.042 30.68,51.042 v4(30.68,50.996)
  Top Layer w0.3: K3.8@81.26,49.542 v2(81.26,50.242)
  Mid Layer 2 w0.3: v4(30.68,50.996) 33.617,48.059 79.077,48.059 v2(81.26,50.242)
R14: K4.8 ULN2.13 | length 45.5
  Top Layer w0.2: ULN2.13@29.285,51.542 v4(30.06,51.542)
  Top Layer w0.3: K4.8@72.06,49.542 v2(72.06,50.242)
  Mid Layer 2 w0.3: v4(30.06,51.542) 30.901,51.542 33.982,48.46 61.646,48.46 70.279,48.46 v2(72.06,50.242)
R15: K5.8 ULN2.14 | length 36.2
  Top Layer w0.2: ULN2.14@29.285,52.042 30.598,52.042 v4(30.653,52.097)
  Top Layer w0.3: K5.8@62.86,49.542 v2(62.86,50.242)
  Mid Layer 2 w0.3: v4(30.653,52.097) 30.691,52.059 31.144,52.059 34.341,48.862 61.48,48.862 v2(62.86,50.242)
R16: K6.8 ULN2.15 | length 26.9
  Top Layer w0.2: ULN2.15@29.285,52.542 29.941,52.542 30.034,52.635 v4(30.115,52.635)
  Top Layer w0.3: K6.8@53.66,49.542 v2(53.66,50.242)
  Mid Layer 2 w0.3: v4(30.115,52.635) 31.268,52.635 34.639,49.264 52.682,49.264 v2(53.66,50.242)
R17: K7.8 ULN2.16 | length 18.5
  Top Layer w0.2: ULN2.16@28.46,53.367 ULN2.16@28.46,53.367 28.483,53.342 v4(29.26,53.342)
  Top Layer w0.3: K7.8@44.46,49.542 v2(44.46,50.242)
  Mid Layer 2 w0.3: v4(29.26,53.342) 31.26,53.342 34.937,49.665 43.883,49.665 v2(44.46,50.242)
R18: K8.8 ULN2.17 | length 10.1
  Top Layer w0.2: ULN2.17@27.96,53.367 27.97,53.377 27.97,53.802 28.21,54.042 v4(29.26,54.042)
  Top Layer w0.3: K8.8@35.26,49.542 v2(35.26,50.242)
  Mid Layer 2 w0.3: v4(29.26,54.042) 31.36,54.042 35.01,50.392 35.029,50.392 35.179,50.242 v2(35.26,50.242)
R21: K9.8 ULN1.10 | length 15.5
  Top Layer w0.2: ULN1.10@28.46,42.117 28.46,42.119 28.483,42.142 v4(29.26,42.142)
  Top Layer w0.3: v2(41.46,45.242) K9.8@41.46,45.942
  Mid Layer 1 w0.3: v4(29.26,42.142) 30.96,42.142 34.674,45.856 40.847,45.856 v2(41.46,45.242)
R22: K10.8 ULN1.11 | length 24.1
  Top Layer w0.2: ULN1.11@29.285,42.942 29.963,42.942 v4(30.024,42.881)
  Top Layer w0.3: v2(50.66,45.242) K10.8@50.66,45.942
  Mid Layer 1 w0.3: v4(30.024,42.881) 30.036,42.869 31.12,42.869 34.683,46.433 49.47,46.433 v2(50.66,45.242)
R23: K11.8 ULN1.12 | length 33.4
  Top Layer w0.2: ULN1.12@29.285,43.442 30.634,43.442 v4(30.68,43.396)
  Top Layer w0.3: v2(59.86,45.242) K11.8@59.86,45.942
  Mid Layer 1 w0.3: v4(30.68,43.396) 31.079,43.396 34.516,46.834 58.268,46.834 v2(59.86,45.242)
R24: K12.8 ULN1.13 | length 42.7
  Top Layer w0.2: ULN1.13@29.285,43.942 v4(30.06,43.942)
  Top Layer w0.3: v2(69.06,45.242) K12.8@69.06,45.942
  Mid Layer 1 w0.3: v4(30.06,43.942) 31.057,43.942 34.35,47.236 67.067,47.236 v2(69.06,45.242)
R25: K13.8 ULN1.14 | length 52
  Top Layer w0.2: ULN1.14@29.285,44.442 30.598,44.442 v4(30.653,44.497)
  Top Layer w0.3: v2(78.26,45.242) K13.8@78.26,45.942
  Mid Layer 1 w0.3: v4(30.653,44.497) 31.043,44.497 34.184,47.637 75.865,47.637 v2(78.26,45.242)
R26: K14.8 ULN1.15 | length 61.3
  Top Layer w0.2: ULN1.15@29.285,44.942 29.941,44.942 30.034,45.035 v4(30.115,45.035)
  Top Layer w0.3: v2(87.46,45.242) K14.8@87.46,45.942
  Mid Layer 1 w0.3: v4(30.115,45.035) 31.013,45.035 34.017,48.039 84.664,48.039 v2(87.46,45.242)
R27: K15.8 ULN1.16 | length 71.4
  Top Layer w0.2: ULN1.16@28.46,45.767 ULN1.16@28.46,45.767 28.483,45.742 v4(29.26,45.742)
  Top Layer w0.3: v2(96.66,45.242) K15.8@96.66,45.942
  Mid Layer 1 w0.3: v4(29.26,45.742) 31.153,45.742 33.851,48.441 93.462,48.441 v2(96.66,45.242)
R28: K16.8 ULN1.17 | length 81.6
  Top Layer w0.2: ULN1.17@27.96,45.767 27.97,45.777 27.97,46.202 28.21,46.442 v4(29.26,46.442)
  Top Layer w0.3: v2(105.86,45.242) K16.8@105.86,45.942
  Mid Layer 1 w0.3: v4(29.26,46.442) 31.26,46.442 33.66,48.842 102.26,48.842 v2(105.86,45.242)
R31: K17.8 ULN3.10 | length 15.5
  Top Layer w0.2: ULN3.10@28.46,16.617 28.46,16.619 28.483,16.642 v4(29.26,16.642)
  Top Layer w0.3: K17.8@41.46,20.442 41.456,20.438 41.475,20.418 v2(41.475,19.825)
  Mid Layer 1 w0.3: v4(29.26,16.642) 30.96,16.642 34.749,20.431 40.69,20.431 41.296,19.825 v2(41.475,19.825)
R32: K18.8 ULN3.11 | length 24
  Top Layer w0.2: ULN3.11@29.285,17.442 29.295,17.433 29.973,17.433 v4(30.024,17.381)
  Top Layer w0.3: K18.8@50.66,20.442 50.673,20.429 v2(50.673,19.778)
  Mid Layer 1 w0.3: v4(30.024,17.381) 30.036,17.369 31.12,17.369 34.583,20.833 49.57,20.833 50.625,19.778 v2(50.673,19.778)
R33: K19.8 ULN3.12 | length 33.2
  Top Layer w0.2: ULN3.12@29.285,17.942 30.634,17.942 v4(30.68,17.896)
  Top Layer w0.3: v2(59.85,19.805) 59.85,20.431 K19.8@59.86,20.442
  Mid Layer 1 w0.3: v4(30.68,17.896) 31.079,17.896 34.416,21.234 58.368,21.234 59.798,19.805 v2(59.85,19.805)
R34: K20.8 ULN3.13 | length 42.5
  Top Layer w0.2: ULN3.13@29.285,18.442 v4(30.06,18.442)
  Top Layer w0.3: v2(69.051,19.79) 69.051,20.433 K20.8@69.06,20.442
  Mid Layer 1 w0.3: v4(30.06,18.442) 31.057,18.442 34.25,21.636 67.167,21.636 69.013,19.79 v2(69.051,19.79)
R35: K21.8 ULN3.14 | length 51.8
  Top Layer w0.2: ULN3.14@29.285,18.942 30.598,18.942 v4(30.653,18.997)
  Top Layer w0.3: v2(78.249,19.799) 78.249,20.431 K21.8@78.26,20.442
  Mid Layer 1 w0.3: v4(30.653,18.997) 31.043,18.997 34.084,22.037 75.965,22.037 78.203,19.799 v2(78.249,19.799)
R36: K22.8 ULN3.15 | length 61.1
  Top Layer w0.2: ULN3.15@29.285,19.442 29.941,19.442 30.034,19.535 v4(30.115,19.535)
  Top Layer w0.3: K22.8@87.46,20.442 87.465,20.438 v2(87.465,19.843)
  Mid Layer 1 w0.3: v4(30.115,19.535) 31.013,19.535 33.917,22.439 84.764,22.439 87.36,19.843 v2(87.465,19.843)
R37: K23.8 ULN3.16 | length 71.2
  Top Layer w0.2: ULN3.16@28.46,20.267 28.46,20.265 28.483,20.242 v4(29.26,20.242)
  Top Layer w0.3: v2(96.643,19.805) 96.643,20.424 K23.8@96.66,20.442
  Mid Layer 1 w0.3: v4(29.26,20.242) 31.153,20.242 33.751,22.841 93.562,22.841 96.598,19.805 v2(96.643,19.805)
R38: K24.8 ULN3.17 | length 81.4
  Top Layer w0.2: ULN3.17@27.96,20.267 27.97,20.277 27.97,20.702 28.21,20.942 v4(29.26,20.942)
  Top Layer w0.3: v2(105.851,19.807) 105.851,20.433 K24.8@105.86,20.442
  Mid Layer 1 w0.3: v4(29.26,20.942) 31.26,20.942 33.56,23.242 102.36,23.242 105.795,19.807 v2(105.851,19.807)
R41: K30.8 ULN4.12 | length 94.7
  Top Layer w0.2: ULN4.12@29.285,25.542 30.634,25.542 v4(30.68,25.496)
  Top Layer w0.3: K30.8@113.26,14.142 v2(114.06,14.142)
  Mid Layer 2 w0.3: v4(30.68,25.496) 33.617,22.559 113.144,22.559 114.06,21.642 v2(114.06,14.142)
R42: K29.8 ULN4.13 | length 87.2
  Top Layer w0.2: ULN4.13@29.285,26.042 v4(30.06,26.042)
  Top Layer w0.3: K29.8@113.26,23.842 v2(114.06,23.842)
  Mid Layer 2 w0.3: v4(30.06,26.042) 30.901,26.042 33.982,22.96 61.646,22.96 113.179,22.96 v2(114.06,23.842)
R43: K28.8 ULN4.14 | length 96.3
  Top Layer w0.2: ULN4.14@29.285,26.542 30.598,26.542 v4(30.653,26.597)
  Top Layer w0.3: K28.8@113.26,33.542 v2(114.06,33.542)
  Mid Layer 2 w0.3: v4(30.653,26.597) 30.691,26.559 30.952,26.559 34.149,23.362 61.48,23.362 112.58,23.362 113.862,24.644 113.862,33.263 114.06,33.461 v2(114.06,33.542)
R44: K27.8 ULN4.15 | length 105.5
  Top Layer w0.2: ULN4.15@29.285,27.042 29.941,27.042 30.034,27.135 v4(30.115,27.135)
  Top Layer w0.3: K27.8@113.26,43.242 v2(114.06,43.242)
  Mid Layer 2 w0.3: v4(30.115,27.135) 30.944,27.135 34.315,23.764 112.414,23.764 113.46,24.81 113.46,39.742 114.06,40.342 v2(114.06,43.242)
R45: K26.8 ULN4.16 | length 115.6
  Top Layer w0.2: ULN4.16@28.46,27.867 28.46,27.865 28.483,27.842 v4(29.26,27.842)
  Top Layer w0.3: K26.8@113.26,52.942 113.36,52.942 v2(114.06,52.942)
  Mid Layer 2 w0.3: v4(29.26,27.842) 30.804,27.842 34.481,24.165 112.247,24.165 113.059,24.976 113.059,49.541 114.06,50.542 v2(114.06,52.942)
R46: K25.8 ULN4.17 | length 125.9
  Top Layer w0.2: ULN4.17@27.96,27.867 27.97,27.877 27.97,28.302 28.21,28.542 v4(29.26,28.542)
  Top Layer w0.3: K25.8@113.26,62.542 v2(114.06,62.542)
  Mid Layer 2 w0.3: v4(29.26,28.542) 30.728,28.542 34.704,24.567 112.081,24.567 112.657,25.143 112.657,58.839 114.06,60.242 v2(114.06,62.542)
R\E\S\E\T\: B1.5 P8.9 P9.9 R82.2 | length 56
  Top Layer w0.2: B1.5@10.725,36.1 v1(11.425,36.1) ; v1(11.5,56.5) 11.5,56.51 12.395,57.405 12.405,57.405 12.36,57.45 12.36,60.145 P8.9@12.405,60.19 ; P9.9@12.405,7 12.425,7.02 v1(12.425,8.5)
  Mid Layer 2 w0.2: v1(11.5,56.5) 11.125,56.125 11.125,36.973 11.425,36.673 11.425,34.7 13.023,33.102 13.023,10.698 11.825,9.5 11.825,9.1 v1(12.425,8.5)
RS485_DE: B1.19 B2.3 B2.4 | length 7.5
  Top Layer w0.2: B1.19@6.525,35.1 9.258,35.1 9.458,34.9 v1(9.5,34.9) ; B2.4@9.025,31.15 B2.3@9.525,31.15 9.525,31.867 9.3,32.092 v1(9.3,32.1)
  Mid Layer 2 w0.2: v1(9.3,32.1) 9.3,32.142 9.5,32.342 v1(9.5,34.9)
RS485_RX: B1.27 B2.2 | length 2.5
  Top Layer w0.2: B1.27@9.625,33.5 9.625,32.675 10.025,32.275 B2.2@10.025,31.15
RS485_TX: B1.26 B2.5 | length 2.6
  Top Layer w0.2: B2.5@8.525,31.15 8.525,32.125 9.125,32.725 B1.26@9.125,33.5
S\S\: B1.22 P8.4 P9.4 | length 59.1
  Top Layer w0.2: v1(7.125,32.7) B1.22@7.125,33.5 ; P9.4@8.595,10.81 8.625,10.78 v1(8.625,9.3) ; P8.4@8.595,64 8.6,63.995 v1(8.6,62.5)
  Mid Layer 2 w0.2: v1@7.15,32.51 7.15,32.175 8.322,31.003 8.322,16.397 7.325,15.4 7.325,13.4 8.625,12.1 v1(8.625,9.3) ; v1@7.173,32.51 7.173,32.652 v1(7.125,32.7) 7.125,34.339 8.222,35.436 8.222,62.122 v1(8.6,62.5)
SCK: B1.23 P8.3 P9.3 | length 59
  Top Layer w0.2: B1.23@7.625,33.5 v1(7.625,34.2) ; P9.3@8.595,7 8.625,7.03 v1(8.625,8.5) ; P8.3@8.595,60.19 8.674,60.269 v1(8.674,61.7)
  Mid Layer 2 w0.2: v1(8.625,8.5) 9.125,9 9.125,12.3 7.739,13.686 7.739,15.314 8.623,16.198 8.623,31.402 7.625,32.4 v1(7.625,34.2) 8.576,35.151 8.576,61.458 8.626,61.507 8.626,61.652 v1(8.674,61.7)
SCL_DRV: B1.28 MCP1.8 MCP2.8 R80.2 | length 37.8
  Top Layer w0.2: B1.28@10.125,33.5 10.125,33.35 10.175,33.3 10.325,33.3 10.525,33.1 v1(17.4,33.1) ; R80.2@15.44,24.3 16.66,24.3 16.818,24.142 v1(16.885,24.142) 16.916,24.173 18.216,24.173 MCP2.8@18.235,24.192 ; v1(16.885,49.642) 16.916,49.673 18.216,49.673 MCP1.8@18.235,49.692
  Mid Layer 2 w0.2: v1(16.885,24.142) 16.885,33.1 ; v1(16.885,49.642) 16.885,33.1 ; v1(17.4,33.1) 16.885,33.1
SDA_DRV: B1.1 MCP1.9 MCP2.9 R79.2 | length 36
  Top Layer w0.2: B1.1@10.725,34.1 10.875,34.1 11.275,33.7 v1(15.9,33.7) ; R79.2@15.44,23.5 15.461,23.521 16.364,23.521 v1(16.385,23.542) MCP2.9@18.235,23.542 ; v1(16.385,49.042) MCP1.9@18.235,49.042
  Mid Layer 2 w0.2: v1(15.9,33.7) 16.385,33.7 ; v1(16.385,23.542) 16.385,33.7 ; v1(16.385,49.042) 16.385,33.7
SWCLK: B1.21 P8.12 P9.12 | length 77.7
  Top Layer w0.2: v1(5.725,33.8) 5.773,33.848 6.123,33.848 6.375,34.1 B1.21@6.525,34.1 ; P9.12@13.675,10.81 13.725,10.76 v1(13.725,9.3) ; v1(13.675,62.4) P8.12@13.675,64
  Mid Layer 2 w0.2: v1(13.675,62.4) 13.666,62.409 13.666,62.734 13,63.4 7.2,63.4 6.3,62.5 6.3,58.6 7.619,57.281 7.619,35.72 5.725,33.827 v1(5.725,33.8) 5.725,32.1 7.719,30.106 7.719,16.794 6.225,15.3 6.225,8.9 7.425,7.7 12.525,7.7 13.025,8.2 13.025,8.6 v1(13.725,9.3)
SWDIO: B1.20 P8.11 P9.11 | length 79.9
  Top Layer w0.2: v1(5.725,34.6) B1.20@6.525,34.6 ; P9.11@13.675,7 13.725,7.05 v1(13.725,8.5) ; P8.11@13.675,60.19 v1(13.675,61.7)
  Mid Layer 2 w0.2: v1(13.675,61.7) 13.723,61.748 13.948,61.748 14.3,62.1 14.3,62.527 13.125,63.702 7.075,63.702 5.998,62.625 5.998,58.475 7.317,57.156 7.317,36.192 v1(5.725,34.6) 5.225,34.1 5.225,32.173 7.417,29.981 7.417,16.992 5.923,15.498 5.923,8.775 7.3,7.398 12.65,7.398 13.725,8.473 v1(13.725,8.5)
"VCC 5V": B2.10 C10.1 C12.1 C13.1 C17.1 LD1.1 LD1.3 P10.3 P11.3 | length 46.1
  Top Layer w0.2: 9.9,22.9 11.825,24.825 C10.1@11.825,28.26 ; B2.10@10.525,28.25 10.535,28.26 C10.1@11.789,28.26
  Top Layer w0.4: C17.1@6.4,23.5 9.3,23.5 9.9,22.9 10.3,22.5 C13.1@10.3,20.2 ; LD1.1@8.2,17.9 7.034,17.9 6.8,18.134 6.8,19.566 7.034,19.8 9.22,19.8 9.46,20.04 C13.1@10.14,20.04 ; C13.1@10.14,20.04 C13.1@10.3,20.2 ; C13.1@10.14,20.04 C13.1@10.3,20.2
  Top Layer w0.5: P11.3@1.4,28.42 3.5,28.42 ; P10.3@1.4,41.58 3.5,41.58 3.5,28.42 ; C17.1@6.4,23.5 3.5,23.5 3.5,28.42
pads on no net: B1.2 B1.8 B1.9 B1.10 B1.11 B1.12 B1.13 B1.14 B1.15 B1.16 B1.17 B1.18 B2.7 K5.2 K5.7 K6.2 K6.7 K7.2 K7.7 K8.2 K8.7 K13.2 K13.7 K14.2 K14.7 K15.2 K15.7 K16.2 K16.7 K21.2 K21.7 K22.2 K22.7 K23.2 K23.7 K24.2 K24.7 LD1.4 MCP1.7 MCP1.10 MCP1.15 MCP1.16 MCP2.7 MCP2.10 MCP2.15 MCP2.16 ULN1.7 ULN1.18 ULN2.7 ULN2.18 ULN3.7 ULN3.18 ULN4.7 ULN4.10 ULN4.11 ULN4.18
copper on no net:
  other v5: 3.5,3 118.5,3 3.5,68 118.5,68

## Polygon pours and split planes (outlines as drawn)
AGND1 on Top Layer "NONET_L-01_P-001" (solid, remove dead copper, pour order 19): 110.9,70.8 110.9,51.1 32.9,51.1 32.9,70.8
AGND2 on Top Layer "NONET_L-01_P-001" (solid, remove dead copper, pour order 16): 110.9,45 110.9,25.9 32.9,25.9 32.9,45
AGND3 on Top Layer "NONET_L-01_P-001" (solid, remove dead copper, pour order 13): 110.9,19.1 110.9,0 32.9,0 32.9,19.1
GND on Top Layer "GND_L01_P007" (solid, pour order 7): 0,71 0,0 29.7,0 29.7,71
AGND4 on Top Layer "NONET_L-01_P-001" (solid, remove dead copper, pour order 0): 111.2,71 111.2,0 130,0 130,71
AGND1 on Mid Layer 1 "NONET_L-01_P-001" (solid, remove dead copper, pour order 18): 110.9,70.8 110.9,51.1 32.9,51.1 32.9,70.8
AGND2 on Mid Layer 1 "NONET_L-01_P-001" (solid, remove dead copper, pour order 15): 110.9,45 110.9,25.9 32.9,25.9 32.9,45
AGND3 on Mid Layer 1 "NONET_L-01_P-001" (solid, remove dead copper, pour order 12): 110.9,19.1 110.9,0 32.9,0 32.9,19.1
+3V3 on Mid Layer 1 "+3V3_L02_P008" (solid, pour order 8): 0,71 0,0 29.7,0 29.7,71
AGND4 on Mid Layer 1 "NONET_L-01_P-001" (solid, remove dead copper, pour order 1): 111.2,71 111.2,0 130,0 130,71
AGND1 on Mid Layer 2 "NONET_L-01_P-001" (solid, remove dead copper, pour order 17): 110.9,70.8 110.9,51.1 32.9,51.1 32.9,70.8
AGND2 on Mid Layer 2 "NONET_L-01_P-001" (solid, remove dead copper, pour order 14): 110.9,45 110.9,25.9 32.9,25.9 32.9,45
AGND3 on Mid Layer 2 "NONET_L-01_P-001" (solid, remove dead copper, pour order 11): 110.9,19.1 110.9,0 32.9,0 32.9,19.1
GND on Mid Layer 2 "GND_L03_P009" (solid, pour order 9): 0,71 0,0 29.7,0 29.7,71
AGND4 on Mid Layer 2 "NONET_L-01_P-001" (solid, remove dead copper, pour order 2): 111.2,71 111.2,0 130,0 130,71
GND on Bottom Layer "GND_L04_P010" (solid, pour order 10): 0,71 0,0 29.7,0 29.7,71
AGND1 on Bottom Layer "NONET_L-01_P-001" (solid, remove dead copper, pour order 6): 110.9,70.8 110.9,51.1 32.9,51.1 32.9,70.8
AGND2 on Bottom Layer "NONET_L-01_P-001" (solid, remove dead copper, pour order 5): 110.9,45 110.9,25.9 32.9,25.9 32.9,45
AGND3 on Bottom Layer "NONET_L-01_P-001" (solid, remove dead copper, pour order 4): 110.9,19.1 110.9,0 32.9,0 32.9,19.1
AGND4 on Bottom Layer "NONET_L-01_P-001" (solid, remove dead copper, pour order 3): 111.2,71 111.2,0 130,0 130,71

## Silkscreen, mask and mechanical layers (free items; w line width, h text height)
Mechanical 1:
  lines w0.2: 0,0 0,71 6,71 ccw(c7,71) 7,70 14,70 ccw(c14,71) 15,71 130,71 130,0 15,0 ccw(c14,0) 14,1 7,1 ccw(c7,0) 6,0 0,0 ; 0,0 0,0

## Text inside footprints (layer, text, board x,y; h text height)
C16: Top Overlay "+" at 7.1,48.2 h1.5 r90
C17: Top Overlay "+" at 5.7,21.7 h1.5 r270
P1: Top Overlay "2" at 108.44,66.508 h1.27 r180; Top Overlay "1" at 108.44,69.048 h1.27 r180; Top Overlay "31" at 66.276,69.048 h1.27 r180; Top Overlay "32" at 66.276,66.508 h1.27 r180
P2: Top Overlay "20" at 33.016,66.508 h1.27 r180; Top Overlay "19" at 33.016,69.048 h1.27 r180; Top Overlay "1" at 59.94,69.048 h1.27 r180; Top Overlay "2" at 59.94,66.508 h1.27 r180
P3: Top Overlay "2" at 32,29.332 h1.27; Top Overlay "1" at 32,26.792 h1.27; Top Overlay "31" at 74.164,26.792 h1.27; Top Overlay "32" at 74.164,29.332 h1.27
P4: Top Overlay "20" at 107.424,29.332 h1.27; Top Overlay "19" at 107.424,26.792 h1.27; Top Overlay "1" at 80.5,26.792 h1.27; Top Overlay "2" at 80.5,29.332 h1.27
P5: Top Overlay "2" at 32,4.021 h1.27; Top Overlay "1" at 32,1.481 h1.27; Top Overlay "31" at 74.164,1.481 h1.27; Top Overlay "32" at 74.164,4.021 h1.27
P6: Top Overlay "20" at 107.424,4.032 h1.27; Top Overlay "19" at 107.424,1.492 h1.27; Top Overlay "1" at 80.5,1.492 h1.27; Top Overlay "2" at 80.5,4.032 h1.27
P7: Top Overlay "47" at 128.408,66.832 h1.27 r90; Top Overlay "48" at 125.868,66.832 h1.27 r90; Top Overlay "1" at 128.408,3.84 h1.27 r90; Top Overlay "2" at 125.868,3.84 h1.27 r90